# Altium PCB cap_sensor_host.PcbDoc (part 2 of 2)
Units mm, origin at the board's own origin, x right, y up, seen from the top; angles counter-clockwise.
Board outline 190 x 74 mm, 2 copper layers (Top Layer, Bottom Layer); 162 components, 95 nets, 418 pads, 260 vias.
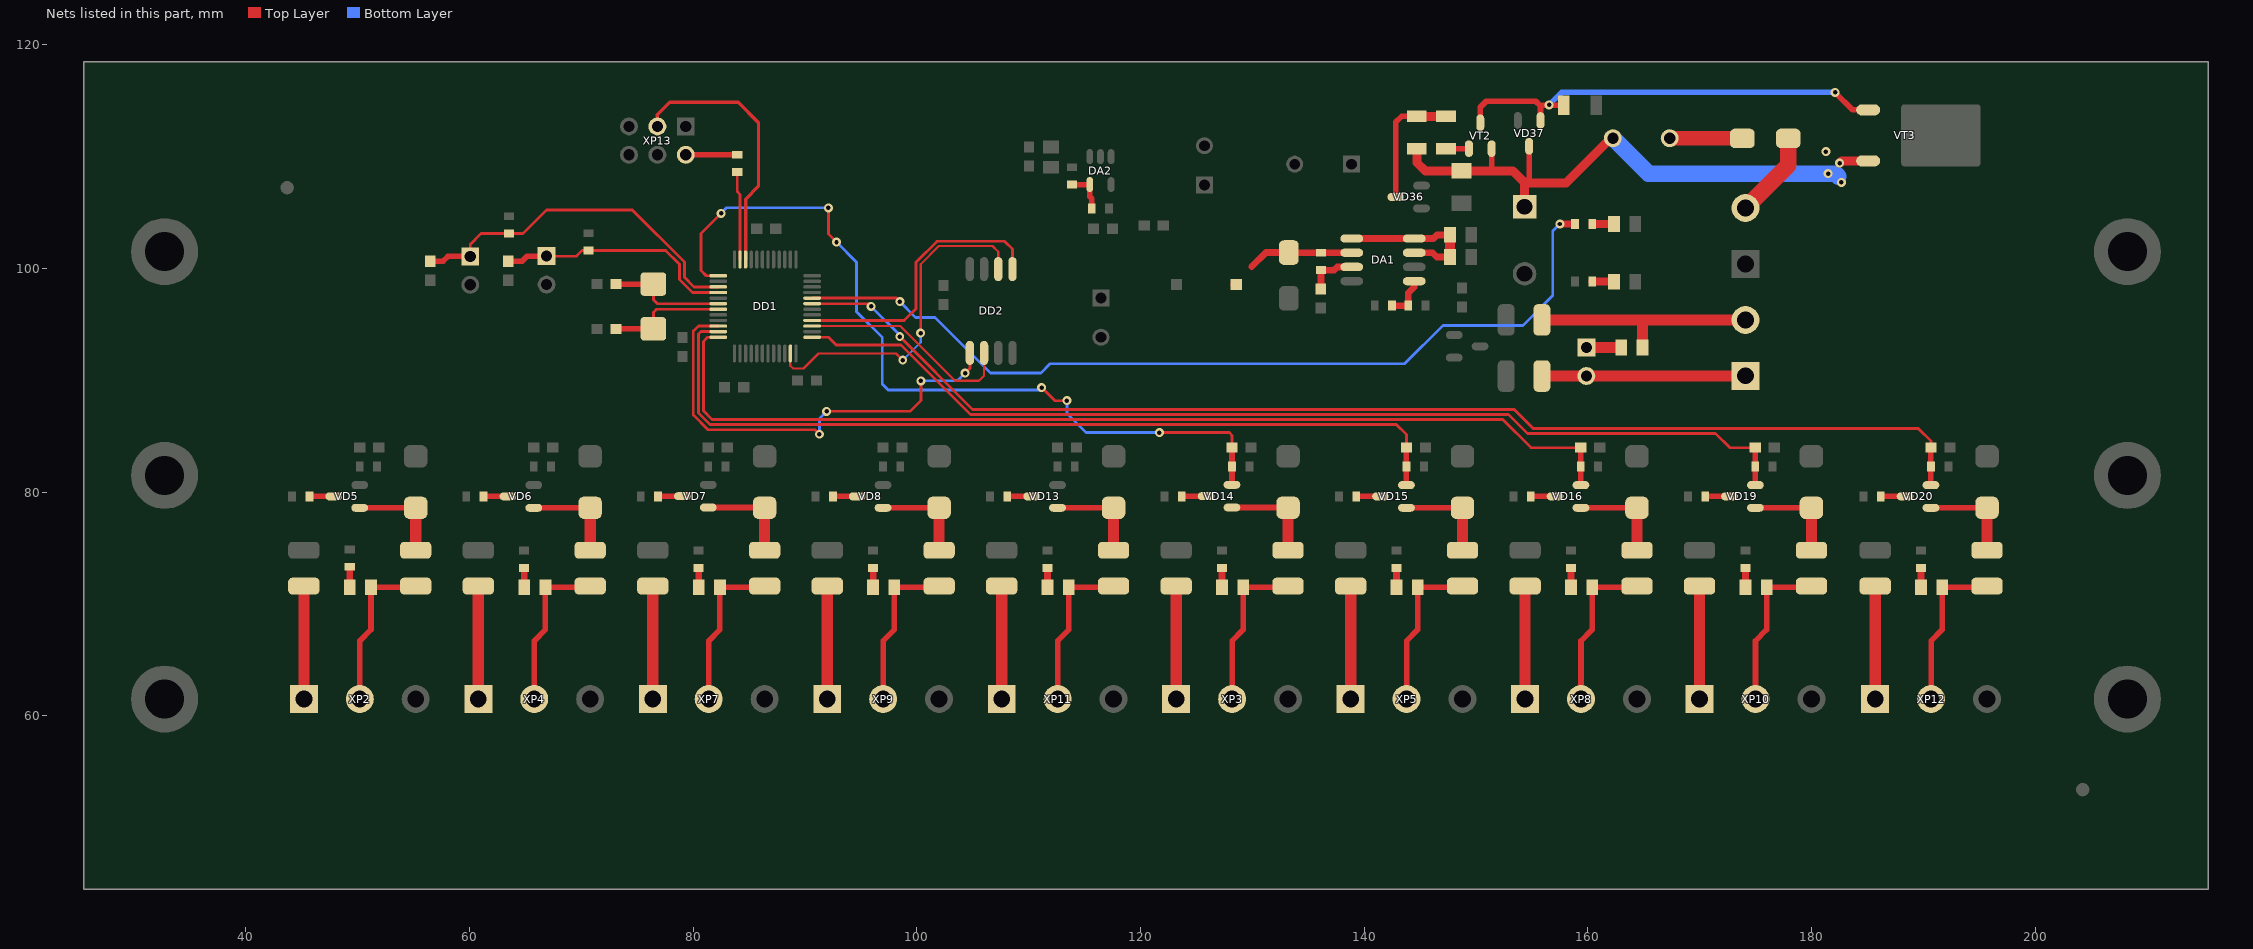
[diagram p2: the nets of this part, all layers, seen from the top]

## Via types
v1: diameter 0.8, hole 0.4, Top Layer to Bottom Layer, 260 vias

## Nets (pads, with @x,y where several pads share a name; then routed paths per layer and width w, separated by ;. In a path a pad name is that pad's centre, name@x,y a point inside that pad or via, vN(x,y) a via of type N, cw(c..) or ccw(c..) an arc to the next point about the centre after c; other vN are vias at no path point) (continued)
INPUT6: C6.2 DD1.1 R14.2 VD14.2 | length 73.6
  Top Layer w0.25: DD1.1@82.25,99.35 81.175,99.35 80.7,99.825 80.7,103.125 v1(82.5,104.925) ; v1(92.1,105.425) 92.1,103.075 v1(92.825,102.35) ; v1(111.175,89.35) 112.35,88.175 v1(113.425,88.175) ; v1(121.7,85.325) 127.95,85.325 128.2,85.075 C6.2@128.2,83.975
  Top Layer w0.5: VD14.2@128.187,80.657 128.187,83.962 C6.2@128.2,83.975
  Bottom Layer w0.25: v1(82.5,104.925) 83,105.425 v1(92.1,105.425) ; v1(92.825,102.35) 94.625,100.55 94.625,96.125 96.925,93.825 96.925,89.65 97.45,89.125 110.95,89.125 v1(111.175,89.35) ; v1(113.425,88.175) 113.425,87.025 115.125,85.325 v1(121.7,85.325)
INPUT7: C7.2 DD1.11 R15.2 VD15.2 | length 77.5
  Top Layer w0.25: DD1.11@82.25,94.35 80.7,94.35 80.475,94.125 80.475,87.089 81.514,86.05 142.875,86.05 143.787,85.138 C7.2@143.787,83.65
  Top Layer w0.5: VD15.2@143.787,80.632 C7.2@143.787,83.65
INPUT8: C8.2 DD1.12 R16.2 VD16.2 | length 90.8
  Top Layer w0.25: DD1.12@82.25,93.85 81.3,93.85 80.925,93.475 80.925,87.275 81.7,86.5 152.4,86.5 154.925,83.975 C8.2@159.375,83.975
  Top Layer w0.5: C8.2@159.375,83.975 159.387,83.963 VD16.2@159.387,80.632
INPUT9: C9.2 DD1.25 R19.2 VD19.2 | length 91.8
  Top Layer w0.25: DD1.25@90.65,93.85 92.1,93.85 92.8,93.15 98.598,93.15 104.798,86.95 152.925,86.95 154.625,85.25 171.425,85.25 172.7,83.975 C9.2@174.975,83.975
  Top Layer w0.5: C9.2@174.975,83.975 174.987,83.963 VD19.2@174.987,80.632
INPUT10: C10.2 DD1.31 R20.2 VD20.2 | length 109.2
  Top Layer w0.25: DD1.31@90.65,96.85 95.675,96.85 v1(95.925,96.6) ; v1(98.48,93.905) 104.984,87.4 153.425,87.4 155.125,85.7 189.55,85.7 190.687,84.563 C10.2@190.687,83.962
  Top Layer w0.5: VD20.2@190.687,80.632 C10.2@190.687,83.962
  Bottom Layer w0.25: v1(95.925,96.6) 98.525,94 98.525,93.95 v1(98.48,93.905)
ISP_START: C27.2 DD1.4 J2.1@66.9,101.1 R33.2 | length 21.5
  Top Layer w0.25: J2.1@66.9,101.1 69.575,101.1 70.075,101.6 77.55,101.6 78.775,100.375 78.775,99.025 79.95,97.85 DD1.4@82.25,97.85
  Top Layer w0.5: C27.2@63.475,100.65 64.725,100.65 65.175,101.1 J2.1@66.9,101.1
MISO: DD1.27 DD2.2 | length 19.6
  Top Layer w0.2: DD1.27@90.65,94.85 98.525,94.85 103.425,89.95 105.575,89.95 106.02,90.395 DD2.2@106.02,92.45
MOSI: DD1.28 DD2.5 | length 25.4
  Top Layer w0.25: DD1.28@90.65,95.35 98.875,95.35 99.925,96.4 99.925,100.551 101.799,102.425 107.875,102.425 108.56,101.74 DD2.5@108.56,99.943
NetC19_2: C19.2 DA1.3 R36.1 | length 4.6
  Top Layer w0.6: C19.2@136.125,98.15 136.15,98.175 R36.1@136.15,99.85 137.325,99.85 137.61,100.135 DA1.3@138.9,100.135
NetC28_2: C28.2 FU23.2 R44.2 VD37.3 VD38.2 VT2.2 VT3.2 | length 53
  Top Layer w0.5: 151.25,108.725 151.407,108.882 VT2.2@151.407,110.713 ; 154.35,107.65 154.759,108.059 VD37.3@154.759,110.926
  Top Layer w0.8: R44.2@144.725,110.7 144.725,109.475 145.475,108.725 C28.2@148.725,108.725 151.25,108.725 153.275,108.725 154.35,107.65 ; VD38.2@154.35,105.525 154.35,107.65 ; FU23.2@162.245,111.65 162.077,111.65 158.077,107.65 154.35,107.65 ; v1(182.525,109.425) 182.72,109.62 VT3.2@185.075,109.62
  Bottom Layer w1.5: FU23.2@162.245,111.65 165.42,108.475 v1(181.5,108.475) 182.15,108.475 182.4,108.225
  other v1: 182.675,107.7 181.3,110.45
NetDA1_1: DA1.1 DA1.7 DA1.8 R39.1 R40.1 | length 14.2
  Top Layer w0.6: DA1.1@138.9,102.675 DA1.8@144.488,102.675 146.2,102.675 146.525,103 R39.1@147.675,103 ; DA1.7@144.488,101.405 146.12,101.405 146.5,101.025 R40.1@147.675,101.025
  Top Layer w0.9: R40.1@147.675,101.025 R39.1@147.675,103
NetDA1_2: DA1.2 L1.2 R36.2 VD33.2 | length 9.5
  Top Layer w0.6: 129.95,100.15 131.225,101.425 VD33.2@133.275,101.425 133.301,101.399 R36.2@136.15,101.399 136.156,101.405 DA1.2@138.9,101.405
NetDA1_5: DA1.5 R37.2 R38.2 | length 3.9
  Top Layer w0.6: R37.2@142.499,96.675 R38.2@143.951,96.675 143.951,97.801 144.488,98.338 DA1.5@144.488,98.865
NetDA2_4: DA2.4 R41.2 R42.1 | length 3.8
  Top Layer w0.5: R41.2@113.9,107.501 115.474,107.501 115.475,106.425 115.65,106.25 R42.1@115.65,105.35
NetFU1_2: FU1.2 XP2.1 | length 9.8
  Top Layer w1: XP2.1@45.2,61.5 FU1.2@45.2,71.3
NetFU2_2: FU2.2 XP3.1 | length 9.8
  Top Layer w1: XP3.1@123.2,61.5 FU2.2@123.2,71.3
NetFU3_2: FU3.2 XP4.1 | length 9.8
  Top Layer w1: XP4.1@60.8,61.5 FU3.2@60.8,71.3
NetFU4_2: FU4.2 XP5.1 | length 9.8
  Top Layer w1: XP5.1@138.8,61.5 FU4.2@138.8,71.3
NetFU5_2: FU5.2 XP7.1 | length 9.8
  Top Layer w1: XP7.1@76.4,61.5 FU5.2@76.4,71.3
NetFU6_2: FU6.2 XP8.1 | length 9.8
  Top Layer w1: XP8.1@154.4,61.5 FU6.2@154.4,71.3
NetFU7_2: FU7.2 XP9.1 | length 9.8
  Top Layer w1: XP9.1@92,61.5 FU7.2@92,71.3
NetFU8_2: FU8.2 XP10.1 | length 9.8
  Top Layer w1: XP10.1@170,61.5 FU8.2@170,71.3
NetFU9_2: FU9.2 XP11.1 | length 9.8
  Top Layer w1: XP11.1@107.6,61.5 FU9.2@107.6,71.3
NetFU10_2: FU10.2 XP12.1 | length 9.8
  Top Layer w1: XP12.1@185.7,61.5 FU10.2@185.7,71.3
NetFU11_1: FU11.1 VD21.2 XP2.2 | length 14.5
  Top Layer w0.5: XP2.2@50.2,61.5 50.2,66.7 51.2,67.7 VD21.2@51.2,71.5 55.1,71.5 FU11.1@55.2,71.6
NetFU11_2: FU11.2 VD1.2 VD5.1 | length 8.8
  Top Layer w0.5: VD5.1@50.187,78.6 VD1.2@55.2,78.6
  Top Layer w1: FU11.2@55.2,74.8 VD1.2@55.2,78.6
NetFU12_1: FU12.1 VD22.2 XP4.2 | length 14.5
  Top Layer w0.5: XP4.2@65.8,61.5 65.8,66.7 66.8,67.7 VD22.2@66.8,71.5 70.7,71.5 FU12.1@70.8,71.6
NetFU12_2: FU12.2 VD2.2 VD6.1 | length 8.8
  Top Layer w0.5: VD6.1@65.762,78.6 VD2.2@70.8,78.6
  Top Layer w1: FU12.2@70.8,74.8 VD2.2@70.8,78.6
NetFU13_1: FU13.1 VD23.2 XP7.2 | length 14.5
  Top Layer w0.5: XP7.2@81.4,61.5 81.4,66.7 82.4,67.7 VD23.2@82.4,71.5 86.3,71.5 FU13.1@86.4,71.6
NetFU13_2: FU13.2 VD3.2 VD7.1 | length 8.8
  Top Layer w0.5: VD7.1@81.362,78.625 86.375,78.625 VD3.2@86.4,78.6
  Top Layer w1: FU13.2@86.4,74.8 VD3.2@86.4,78.6
NetFU14_1: FU14.1 VD24.2 XP9.2 | length 14.5
  Top Layer w0.5: XP9.2@97,61.5 97,66.7 98,67.7 VD24.2@98,71.5 101.9,71.5 FU14.1@102,71.6
NetFU14_2: FU14.2 VD4.2 VD8.1 | length 8.8
  Top Layer w0.5: VD8.1@96.987,78.6 VD4.2@102,78.6
  Top Layer w1: FU14.2@102,74.8 VD4.2@102,78.6
NetFU15_1: FU15.1 VD25.2 XP11.2 | length 14.5
  Top Layer w0.5: XP11.2@112.6,61.5 112.6,66.7 113.6,67.7 VD25.2@113.6,71.5 117.5,71.5 FU15.1@117.6,71.6
NetFU15_2: FU15.2 VD9.2 VD13.1 | length 8.8
  Top Layer w0.5: VD13.1@112.587,78.6 VD9.2@117.6,78.6
  Top Layer w1: FU15.2@117.6,74.8 VD9.2@117.6,78.6
NetFU16_1: FU16.1 VD26.2 XP3.2 | length 14.5
  Top Layer w0.5: XP3.2@128.2,61.5 128.2,66.7 129.2,67.7 VD26.2@129.2,71.5 133.1,71.5 FU16.1@133.2,71.6
NetFU16_2: FU16.2 VD10.2 VD14.1 | length 8.8
  Top Layer w0.5: VD14.1@128.187,78.625 133.175,78.625 VD10.2@133.2,78.6
  Top Layer w1: FU16.2@133.2,74.8 VD10.2@133.2,78.6
NetFU17_1: FU17.1 VD27.2 XP5.2 | length 14.5
  Top Layer w0.5: XP5.2@143.8,61.5 143.8,66.7 144.8,67.7 VD27.2@144.8,71.5 148.7,71.5 FU17.1@148.8,71.6
NetFU17_2: FU17.2 VD11.2 VD15.1 | length 8.8
  Top Layer w0.5: VD15.1@143.787,78.6 VD11.2@148.8,78.6
  Top Layer w1: FU17.2@148.8,74.8 VD11.2@148.8,78.6
NetFU18_1: FU18.1 VD28.2 XP8.2 | length 14.5
  Top Layer w0.5: XP8.2@159.4,61.5 159.4,66.7 160.4,67.7 VD28.2@160.4,71.5 164.3,71.5 FU18.1@164.4,71.6
NetFU18_2: FU18.2 VD12.2 VD16.1 | length 8.8
  Top Layer w0.5: VD16.1@159.387,78.6 VD12.2@164.4,78.6
  Top Layer w1: FU18.2@164.4,74.8 VD12.2@164.4,78.6
NetFU19_1: FU19.1 VD29.2 XP10.2 | length 14.5
  Top Layer w0.5: XP10.2@175,61.5 175,66.7 176,67.7 VD29.2@176,71.5 179.9,71.5 FU19.1@180,71.6
NetFU19_2: FU19.2 VD17.2 VD19.1 | length 8.8
  Top Layer w0.5: VD19.1@174.987,78.6 VD17.2@180,78.6
  Top Layer w1: FU19.2@180,74.8 VD17.2@180,78.6
NetFU20_1: FU20.1 VD30.2 XP12.2 | length 14.5
  Top Layer w0.5: XP12.2@190.7,61.5 190.7,66.7 191.7,67.7 VD30.2@191.7,71.5 195.6,71.5 FU20.1@195.7,71.6
NetFU20_2: FU20.2 VD18.2 VD20.1 | length 8.8
  Top Layer w0.5: VD20.1@190.687,78.6 VD18.2@195.7,78.6
  Top Layer w1: FU20.2@195.7,74.8 VD18.2@195.7,78.6
NetFU21_2: FU21.2 J2.2@159.875,90.385 XP6.1 | length 18.2
  Top Layer w1: FU21.2@155.9,90.375 174.075,90.375 XP6.1@174.1,90.4
NetFU22_2: FU22.2 R43.1 XP6.2 | length 20.9
  Top Layer w1: FU22.2@155.95,95.45 FU22.2@155.9,95.4 164.875,95.4 ; R43.1@164.9,92.8 164.9,95.375 164.875,95.4 ; XP6.2@174.1,95.4 164.875,95.4
NetFU23_1: FU23.1 VD35.2 | length 6.5
  Top Layer w1.3: FU23.1@167.325,111.65 173.8,111.65 VD35.2@173.825,111.625
NetJ2_1: J2.1@159.875,92.925 R43.2 | length 3.2
  Top Layer w1: J2.1@159.775,92.925 R43.2@163,92.925
NetR1_1: R1.1 VD5.3 | length 2.2
  Top Layer w0.5: R1.1@45.7,79.625 45.709,79.616 VD5.3@47.876,79.616
NetR2_1: R2.1 VD6.3 | length 2.2
  Top Layer w0.5: R2.1@61.284,79.616 VD6.3@63.451,79.616
NetR3_1: R3.1 VD7.3 | length 2.2
  Top Layer w0.5: R3.1@76.884,79.641 VD7.3@79.051,79.641
NetR4_1: R4.1 VD8.3 | length 2.2
  Top Layer w0.5: R4.1@92.509,79.616 VD8.3@94.676,79.616
NetR9_1: R9.1 VD13.3 | length 2.2
  Top Layer w0.5: R9.1@108.109,79.616 VD13.3@110.276,79.616
NetR10_1: R10.1 VD14.3 | length 2.2
  Top Layer w0.5: R10.1@123.709,79.641 VD14.3@125.876,79.641
NetR11_1: R11.1 VD15.3 | length 2.2
  Top Layer w0.5: R11.1@139.309,79.616 VD15.3@141.476,79.616
NetR12_1: R12.1 VD16.3 | length 2.2
  Top Layer w0.5: R12.1@154.909,79.616 VD16.3@157.076,79.616
NetR17_1: R17.1 VD19.3 | length 2.2
  Top Layer w0.5: R17.1@170.509,79.616 VD19.3@172.676,79.616
NetR18_1: R18.1 VD20.3 | length 2.2
  Top Layer w0.5: R18.1@186.209,79.616 VD20.3@188.376,79.616
NetR21_1: R21.1 VD21.1 | length 1.8
  Top Layer w0.6: VD21.1@49.3,71.5 R21.1@49.3,73.325
NetR22_1: R22.1 VD22.1 | length 1.7
  Top Layer w0.6: VD22.1@64.9,71.5 R22.1@64.9,73.225
NetR23_1: R23.1 VD23.1 | length 1.7
  Top Layer w0.6: VD23.1@80.5,71.5 R23.1@80.5,73.225
NetR24_1: R24.1 VD24.1 | length 1.7
  Top Layer w0.6: VD24.1@96.1,71.5 R24.1@96.1,73.225
NetR25_1: R25.1 VD25.1 | length 1.7
  Top Layer w0.6: VD25.1@111.7,71.5 R25.1@111.7,73.225
NetR26_1: R26.1 VD26.1 | length 1.7
  Top Layer w0.6: VD26.1@127.3,71.5 R26.1@127.3,73.225
NetR27_1: R27.1 VD27.1 | length 1.7
  Top Layer w0.6: VD27.1@142.9,71.5 R27.1@142.9,73.225
NetR28_1: R28.1 VD28.1 | length 1.7
  Top Layer w0.6: VD28.1@158.5,71.5 R28.1@158.5,73.225
NetR29_1: R29.1 VD29.1 | length 1.7
  Top Layer w0.6: VD29.1@174.1,71.5 R29.1@174.1,73.225
NetR30_1: R30.1 VD30.1 | length 1.7
  Top Layer w0.6: VD30.1@189.8,71.5 R30.1@189.8,73.225
NetR31_2: R31.2 XP13.2 | length 4.6
  Top Layer w0.5: XP13.2@79.35,110.16 83.936,110.16 R31.2@83.95,110.174
NetR34_2: R34.2 VD32.1 | length 2
  Top Layer w0.7: R34.2@160.399,98.825 VD32.1@162.35,98.825
NetR35_2: R35.2 VD31.1 | length 2
  Top Layer w0.7: R35.2@160.399,103.975 VD31.1@162.35,103.975
NetR44_1: R44.1 R45.2 VD36.3 | length 11.4
  Top Layer w0.5: VD36.3@142.825,106.391 142.825,113.075 143.35,113.6 R44.1@144.725,113.6
  Top Layer w0.8: R44.1@144.725,113.6 R45.2@147.325,113.6
NetR45_1: R45.1 VT2.1 | length 2
  Top Layer w0.5: R45.1@147.338,110.713 VT2.1@149.375,110.713
NetR46_2: R46.2 VD37.1 VT2.3 VT3.1 | length 40.2
  Top Layer w0.5: VT2.3@150.391,113.024 150.391,114.416 150.925,114.95 155.35,114.95 155.775,114.525 ; VD37.1@155.775,113.237 155.775,114.525 ; R46.2@157.85,114.6 155.85,114.6 155.775,114.525 ; v1(182.125,115.75) 183.695,114.18 VT3.1@185.075,114.18
  Bottom Layer w0.5: v1(156.55,114.625) 157.675,115.75 v1(182.125,115.75)
PWR: DD1.32 R35.1 | length 79.9
  Top Layer w0.25: DD1.32@90.65,97.35 98.175,97.35 v1(98.5,97.025)
  Top Layer w0.6: v1@157.45,103.975 v1(157.5,103.975) R35.1@158.85,103.975
  Bottom Layer w0.25: v1(98.5,97.025) 99.9,95.625 101.636,95.625 106.611,90.65 111.1,90.65 111.925,91.475 143.625,91.475 147.05,94.9 154.2,94.9 156.875,97.575 156.875,103.35 v1(157.5,103.975)
RESET: C14.2 DD1.3 J1.1 R32.2 | length 31.9
  Top Layer w0.25: J1.1@60.075,101.075 60.075,102.15 61.051,103.126 R32.2@63.55,103.126 64.801,103.126 66.9,105.225 74.561,105.225 79.225,100.561 79.225,99.211 80.086,98.35 DD1.3@82.25,98.35
  Top Layer w0.5: C14.2@56.5,100.65 57.65,100.65 58.075,101.075 J1.1@60.075,101.075
RXD: DD1.46 XP13.3 | length 24
  Top Layer w0.3: XP13.3@76.81,112.7 76.81,113.76 77.9,114.85 84.05,114.85 85.85,113.05 85.85,107.35 84.7,106.2 DD1.46@84.7,100.8
SCK: DD1.23 DD2.6 | length 31
  Top Layer w0.2: DD1.23@88.7,92.4 88.7,91.3 88.95,91.05 89.875,91.05 91.225,92.4 98.15,92.4 v1(98.75,91.8) v1@98.75,91.65 ; v1(100.35,94.225) 100.35,100.375 101.975,102 106.775,102 107.29,101.485 DD2.6@107.29,99.943
  Bottom Layer w0.2: v1@98.975,91.8 v1(98.75,91.8) 100.35,93.4 v1(100.35,94.225)
SS: DD1.10 DD2.1 | length 41.2
  Top Layer w0.25: DD1.10@82.25,94.85 80.475,94.85 80.025,94.4 80.025,86.902 81.352,85.575 90.9,85.575 v1(91.3,85.175) ; v1(91.95,87.225) 99.4,87.225 100.375,88.2 v1(100.375,89.95) ; v1(104.325,90.65) 104.75,91.075 DD2.1@104.75,92.45 DD2.1@104.625,92.325
  Bottom Layer w0.25: v1(91.3,85.175) 91.3,86.575 v1(91.95,87.225) ; v1(100.375,89.95) 103.625,89.95 v1(104.325,90.65)
TXD: DD1.47 R31.1 | length 7.9
  Top Layer w0.25: R31.1@83.95,108.625 83.95,106.875 84.2,106.625 DD1.47@84.2,100.8
VIN: VD35.1 XP1.2 | length 7.8
  Top Layer w1.5: XP1.2@174.1,105.4 177.925,109.225 VD35.1@177.925,111.625
XTALIN: C17.2 DD1.6 QR1.1 | length 10.7
  Top Layer w0.25: QR1.1@76.45,98.6 76.45,97.2 76.8,96.85 DD1.6@82.25,96.85
  Top Layer w0.5: C17.2@73.1,98.6 QR1.1@76.45,98.6
XTALOUT: C18.2 DD1.7 QR1.2 | length 10.7
  Top Layer w0.25: QR1.2@76.45,94.6 76.45,96.075 76.725,96.35 DD1.7@82.25,96.35
  Top Layer w0.5: C18.2@73.1,94.6 QR1.2@76.45,94.6
pads on no net: DD1.9 DD1.14 DD1.15 DD1.22 DD1.24 DD1.30 DD1.33 DD1.34 DD1.35 DD1.36 DD1.37 DD1.39 DD1.40 DD1.42 DD1.43 DD1.45 DD1.48 Rep1.1 Rep2.1 VD36.2 VD37.2 XP13.1 XP13.4 XP13.6

## Polygon pours and split planes (outlines as drawn)
GND on Top Layer "GND_L01_P014" (hatched 90Degree grid 0.15 track 0.2, remove dead copper, pour order 14): 25.5,118.5 215.5,118.5 215.5,44.5 25.5,44.5
GND on Bottom Layer "GND_L02_P020" (hatched 90Degree grid 0.15 track 0.2, remove dead copper, pour order 20): 25.5,118.5 215.5,118.5 215.5,44.5 25.5,44.5

## Keep-outs
Keep-Out Layer:
  the board outline again, w0.254

## Other copper
Top Layer:
  rectangle net +12V: 149.6,97.775 150.625,99.875
  rectangle net +12V: 146.85,97.775 147.95,99.6
  rectangle net NetC28_2: 180.7,106.875 183.55,111.025
  rectangle net +12V: 190.65,96.575 202.7,108.275
  rectangle net +12V: 187.95,108.15 214.773,117.773
  pour cut-out: 156.5,88.25 167.125,88.25 167.125,86 156.5,86
  pour cut-out: 191.25,96.275 191.25,93.65 189.05,93.65 183.05,93.65 183.05,96.275
  pour cut-out: 191.25,92.475 191.25,89.85 189.05,89.85 183.05,89.85 183.05,92.475
  pour cut-out: 188.7,102.85 188.7,100.225 188.575,100.225 182.575,100.225 182.575,102.85
  pour cut-out: 188.7,106.65 188.7,104.025 188.575,104.025 182.575,104.025 182.575,106.65
  pour cut-out: 185.112,47.5 198.5,47.5 198.5,45.25 185.112,45.25
  pour cut-out: 169.413,47.5 181.625,47.5 181.625,45.25 169.413,45.25
  pour cut-out: 153.863,47.5 166,47.5 166,45.25 153.863,45.25
  pour cut-out: 138.238,47.5 150.25,47.5 150.25,45.25 138.238,45.25
  pour cut-out: 122.788,47.5 134.875,47.5 134.875,45.25 122.788,45.25
  pour cut-out: 107.112,47.5 119.125,47.5 119.125,45.25 107.112,45.25
  pour cut-out: 91.613,47.5 103.75,47.5 103.75,45.25 91.613,45.25
  pour cut-out: 75.863,47.5 88,47.5 88,45.25 75.863,45.25
  pour cut-out: 60.363,47.5 72.375,47.5 72.375,45.25 60.363,45.25
  pour cut-out: 187.225,48.525 184.6,48.525 184.6,48.65 184.6,54.65 187.225,54.65
  pour cut-out: 196.975,48.5 194.35,48.5 194.35,48.625 194.35,54.625 196.975,54.625
  pour cut-out: 192.025,48.625 189.4,48.625 189.4,48.75 189.4,54.75 192.025,54.75
  pour cut-out: 171.575,48.525 168.95,48.525 168.95,48.65 168.95,54.65 171.575,54.65
  pour cut-out: 181.325,48.5 178.7,48.5 178.7,48.625 178.7,54.625 181.325,54.625
  pour cut-out: 176.375,48.625 173.75,48.625 173.75,48.75 173.75,54.75 176.375,54.75
  pour cut-out: 155.95,48.5 153.325,48.5 153.325,48.625 153.325,54.625 155.95,54.625
  pour cut-out: 165.7,48.475 163.075,48.475 163.075,48.6 163.075,54.6 165.7,54.6
  pour cut-out: 160.75,48.6 158.125,48.6 158.125,48.725 158.125,54.725 160.75,54.725
  pour cut-out: 140.375,48.525 137.75,48.525 137.75,48.65 137.75,54.65 140.375,54.65
  pour cut-out: 150.125,48.5 147.5,48.5 147.5,48.625 147.5,54.625 150.125,54.625
  pour cut-out: 145.175,48.625 142.55,48.625 142.55,48.75 142.55,54.75 145.175,54.75
  pour cut-out: 124.775,48.525 122.15,48.525 122.15,48.65 122.15,54.65 124.775,54.65
  pour cut-out: 134.525,48.5 131.9,48.5 131.9,48.625 131.9,54.625 134.525,54.625
  pour cut-out: 129.575,48.625 126.95,48.625 126.95,48.75 126.95,54.75 129.575,54.75
  pour cut-out: 109.175,48.5 106.55,48.5 106.55,48.625 106.55,54.625 109.175,54.625
  pour cut-out: 118.925,48.475 116.3,48.475 116.3,48.6 116.3,54.6 118.925,54.6
  pour cut-out: 113.975,48.6 111.35,48.6 111.35,48.725 111.35,54.725 113.975,54.725
  pour cut-out: 93.55,48.525 90.925,48.525 90.925,48.65 90.925,54.65 93.55,54.65
  pour cut-out: 103.3,48.5 100.675,48.5 100.675,48.625 100.675,54.625 103.3,54.625
  pour cut-out: 98.35,48.625 95.725,48.625 95.725,48.75 95.725,54.75 98.35,54.75
  pour cut-out: 77.975,48.525 75.35,48.525 75.35,48.65 75.35,54.65 77.975,54.65
  pour cut-out: 87.725,48.5 85.1,48.5 85.1,48.625 85.1,54.625 87.725,54.625
  pour cut-out: 82.775,48.625 80.15,48.625 80.15,48.75 80.15,54.75 82.775,54.75
  pour cut-out: 62.375,48.525 59.75,48.525 59.75,48.65 59.75,54.65 62.375,54.65
  pour cut-out: 72.125,48.5 69.5,48.5 69.5,48.625 69.5,54.625 72.125,54.625
  pour cut-out: 67.175,48.625 64.55,48.625 64.55,48.75 64.55,54.75 67.175,54.75
  pour cut-out: 51.55,48.625 48.925,48.625 48.925,48.75 48.925,54.75 51.55,54.75
  pour cut-out: 56.5,48.5 53.875,48.5 53.875,48.625 53.875,54.625 56.5,54.625
  pour cut-out: 46.75,48.525 44.125,48.525 44.125,48.65 44.125,54.65 46.75,54.65
  pour cut-out: 44.787,47.475 56.475,47.475 56.475,45.225 44.787,45.225
  pour cut-out: 124.183,102.396 124.225,102.777 124.34,102.987 125.875,103.152 127.384,102.987 127.475,102.897 127.475,94.203 127.43,94.203 126.95,94.052 126,93.952 124.93,94.003 124.475,94.203 124.17,94.764
  pour cut-out: 158.663,99.925 158.663,102.425 164.788,102.425 164.788,99.925
  pour cut-out: 158.563,105.1 158.563,107.6 164.688,107.6 164.688,105.1
  text "PWR" at 159,105.325 h2
  text "PWR" at 183.075,104.35 h2
  text "GND" at 183.05,100.55 h2
  text "CAN" at 159.075,100.225 h2
  text "CANL" at 183.55,93.975 h2
  text "CANH" at 183.525,90.175 h2
  text "120 Ohm" at 156.725,86.425 h1.5
  text "PWR" at 46.45,49 h2 r90
  text "DATA" at 50.95,49 h1.5 r90
  text "GND" at 56.15,49 h2 r90
  text "PWR" at 62.075,49 h2 r90
  text "DATA" at 66.575,49 h1.5 r90
  text "GND" at 71.775,49 h2 r90
  text "PWR" at 77.675,49 h2 r90
  text "DATA" at 82.175,49 h1.5 r90
  text "GND" at 87.375,49 h2 r90
  text "PWR" at 93.25,49 h2 r90
  text "DATA" at 97.75,49 h1.5 r90
  text "GND" at 102.95,49 h2 r90
  text "PWR" at 124.475,49 h2 r90
  text "DATA" at 128.975,49 h1.5 r90
  text "GND" at 134.175,49 h2 r90
  text "PWR" at 140.075,49 h2 r90
  text "DATA" at 144.575,49 h1.5 r90
  text "GND" at 149.775,49 h2 r90
  text "PWR" at 171.275,49 h2 r90
  text "DATA" at 175.775,49 h1.5 r90
  text "GND" at 180.975,49 h2 r90
  text "PWR" at 186.925,49 h2 r90
  text "DATA" at 191.425,49 h1.5 r90
  text "GND" at 196.625,49 h2 r90
  text "PWR" at 108.875,48.975 h2 r90
  text "DATA" at 113.375,48.975 h1.5 r90
  text "GND" at 118.575,48.975 h2 r90
  text "PWR" at 155.65,48.975 h2 r90
  text "DATA" at 160.15,48.975 h1.5 r90
  text "GND" at 165.35,48.975 h2 r90
  text "CHANNEL2" at 60.625,45.6 h1.5
  text "CHANNEL3" at 76.125,45.6 h1.5
  text "CHANNEL4" at 91.875,45.6 h1.5
  text "CHANNEL5" at 107.375,45.6 h1.5
  text "CHANNEL6" at 123.05,45.6 h1.5
  text "CHANNEL7" at 138.5,45.6 h1.5
  text "CHANNEL8" at 154.125,45.6 h1.5
  text "CHANNEL9" at 169.675,45.6 h1.5
  text "CHANNEL10" at 185.375,45.6 h1.5
  text "CHANNEL1" at 45.05,45.575 h1.5
Bottom Layer:
  rectangle net +12V: 190.65,96.575 202.7,108.3
  rectangle net +12V: 146.975,97.775 150.6,99.85
  rectangle net +12V: 187.95,108.15 214.773,117.773
  rectangle net NetC28_2: 180.7,106.875 186.325,111.025
  pour cut-out: 124.183,102.396 124.225,102.777 124.34,102.987 125.875,103.152 127.384,102.987 127.475,102.897 127.475,94.203 127.43,94.203 126.95,94.052 126,93.952 124.93,94.003 124.475,94.203 124.17,94.764

## Silkscreen, mask and mechanical layers (free items; w line width, h text height)
Top Overlay:
  circle w0.254: c169.65,90.35 r1.203
  circle w0.254: c169.65,95.425 r1.203
  circle w0.254: c169.65,100.425 r1.203
  circle w0.254: c169.65,105.45 r1.203
  circle w0.254: c185.65,65.825 r1.203
  circle w0.254: c190.675,65.825 r1.203
  circle w0.254: c195.625,65.825 r1.203
  circle w0.254: c169.95,65.825 r1.203
  circle w0.254: c174.975,65.825 r1.203
  circle w0.254: c179.925,65.825 r1.203
  circle w0.254: c154.35,65.825 r1.203
  circle w0.254: c159.375,65.825 r1.203
  circle w0.254: c164.325,65.825 r1.203
  circle w0.254: c138.75,65.825 r1.203
  circle w0.254: c143.775,65.825 r1.203
  circle w0.254: c148.725,65.825 r1.203
  circle w0.254: c123.15,65.825 r1.203
  circle w0.254: c128.175,65.825 r1.203
  circle w0.254: c133.125,65.825 r1.203
  circle w0.254: c107.55,65.825 r1.203
  circle w0.254: c112.575,65.825 r1.203
  circle w0.254: c117.525,65.825 r1.203
  circle w0.254: c91.95,65.825 r1.203
  circle w0.254: c96.975,65.825 r1.203
  circle w0.254: c101.925,65.825 r1.203
  circle w0.254: c76.35,65.825 r1.203
  circle w0.254: c81.375,65.825 r1.203
  circle w0.254: c86.325,65.825 r1.203
  circle w0.254: c60.75,65.825 r1.203
  circle w0.254: c65.775,65.825 r1.203
  circle w0.254: c70.725,65.825 r1.203
  circle w0.254: c55.125,65.825 r1.203
  circle w0.254: c50.175,65.825 r1.203
  circle w0.254: c45.15,65.825 r1.203
  lines w0.254: 42.1,56.425 198.8,56.425 ; 42.1,64.1 198.775,64.1 ; 44.05,65.85 46.278,65.85 ; 47.75,55.225 47.75,64.1 ; 49.075,65.85 51.303,65.85 ; 52.75,55.275 52.75,64.075 ; 54.025,65.85 56.253,65.85 ; 59.65,65.85 61.878,65.85 ; 63.35,55.225 63.35,64.1 ; 64.675,65.85 66.903,65.85 ; 68.35,55.275 68.35,64.075 ; 69.625,65.85 71.853,65.85 ; 75.25,65.85 77.478,65.85 ; 78.95,55.225 78.95,64.1 ; 80.275,65.85 82.503,65.85 ; 83.95,55.275 83.95,64.075 ; 85.225,65.85 87.453,65.85 ; 90.85,65.85 93.078,65.85 ; 94.55,55.225 94.55,64.1 ; 95.875,65.85 98.103,65.85 ; 99.55,55.275 99.55,64.075 ; 100.825,65.85 103.053,65.85 ; 106.45,65.85 108.678,65.85 ; 110.15,55.225 110.15,64.1 ; 111.475,65.85 113.703,65.85 ; 115.15,55.275 115.15,64.075 ; 116.425,65.85 118.653,65.85 ; 122.05,65.85 124.278,65.85 ; 125.75,55.225 125.75,64.1 ; 127.075,65.85 129.303,65.85 ; 130.75,55.275 130.75,64.075 ; 132.025,65.85 134.253,65.85 ; 137.65,65.85 139.878,65.85 ; 141.35,55.225 141.35,64.1 ; 142.675,65.85 144.903,65.85 ; 146.35,55.275 146.35,64.075 ; 147.625,65.85 149.853,65.85 ; 153.25,65.85 155.478,65.85 ; 156.95,55.225 156.95,64.1 ; 158.275,65.85 160.503,65.85 ; 161.95,55.275 161.95,64.075 ; 163.225,65.85 165.453,65.85 ; 168.85,65.85 171.078,65.85 ; 169.65,89.225 169.65,91.525 ; 169.65,94.3 169.65,96.6 ; 169.65,99.3 169.65,101.6 ; 169.65,104.325 169.65,106.625 ; 171.35,87.9 171.35,108.5 ; 171.35,93.175 179.25,93.175 ; 171.35,103.125 180.4,103.125 ; 172.55,55.225 172.55,64.1 ; 173.875,65.85 176.103,65.85 ; 177.55,55.275 177.55,64.075 ; 178.825,65.85 181.053,65.85 ; 179.275,87.95 179.275,108.475 ; 184.55,65.85 186.778,65.85 ; 188.25,55.225 188.25,64.1 ; 189.575,65.85 191.803,65.85 ; 193.25,55.275 193.25,64.075 ; 194.525,65.85 196.753,65.85
  text "PWR" at 159,105.325 h2
  text "PWR" at 183.075,104.35 h2
  text "GND" at 183.05,100.55 h2
  text "CAN" at 159.075,100.225 h2
  text "CANL" at 183.55,93.975 h2
  text "CANH" at 183.525,90.175 h2
  text "120 Ohm" at 156.725,86.425 h1.5
  text "PWR" at 46.45,49 h2 r90
  text "DATA" at 50.95,49 h1.5 r90
  text "GND" at 56.15,49 h2 r90
  text "PWR" at 62.075,49 h2 r90
  text "DATA" at 66.575,49 h1.5 r90
  text "GND" at 71.775,49 h2 r90
  text "PWR" at 77.675,49 h2 r90
  text "DATA" at 82.175,49 h1.5 r90
  text "GND" at 87.375,49 h2 r90
  text "PWR" at 93.25,49 h2 r90
  text "DATA" at 97.75,49 h1.5 r90
  text "GND" at 102.95,49 h2 r90
  text "PWR" at 124.475,49 h2 r90
  text "DATA" at 128.975,49 h1.5 r90
  text "GND" at 134.175,49 h2 r90
  text "PWR" at 140.075,49 h2 r90
  text "DATA" at 144.575,49 h1.5 r90
  text "GND" at 149.775,49 h2 r90
  text "PWR" at 171.275,49 h2 r90
  text "DATA" at 175.775,49 h1.5 r90
  text "GND" at 180.975,49 h2 r90
  text "PWR" at 186.925,49 h2 r90
  text "DATA" at 191.425,49 h1.5 r90
  text "GND" at 196.625,49 h2 r90
  text "PWR" at 108.875,48.975 h2 r90
  text "DATA" at 113.375,48.975 h1.5 r90
  text "GND" at 118.575,48.975 h2 r90
  text "PWR" at 155.65,48.975 h2 r90
  text "DATA" at 160.15,48.975 h1.5 r90
  text "GND" at 165.35,48.975 h2 r90
  text "CHANNEL2" at 60.625,45.6 h1.5
  text "CHANNEL3" at 76.125,45.6 h1.5
  text "CHANNEL4" at 91.875,45.6 h1.5
  text "CHANNEL5" at 107.375,45.6 h1.5
  text "CHANNEL6" at 123.05,45.6 h1.5
  text "CHANNEL7" at 138.5,45.6 h1.5
  text "CHANNEL8" at 154.125,45.6 h1.5
  text "CHANNEL9" at 169.675,45.6 h1.5
  text "CHANNEL10" at 185.375,45.6 h1.5
  text "CHANNEL1" at 45.05,45.575 h1.5